# EAGLE board chaprshield (EAGLE 6.4)
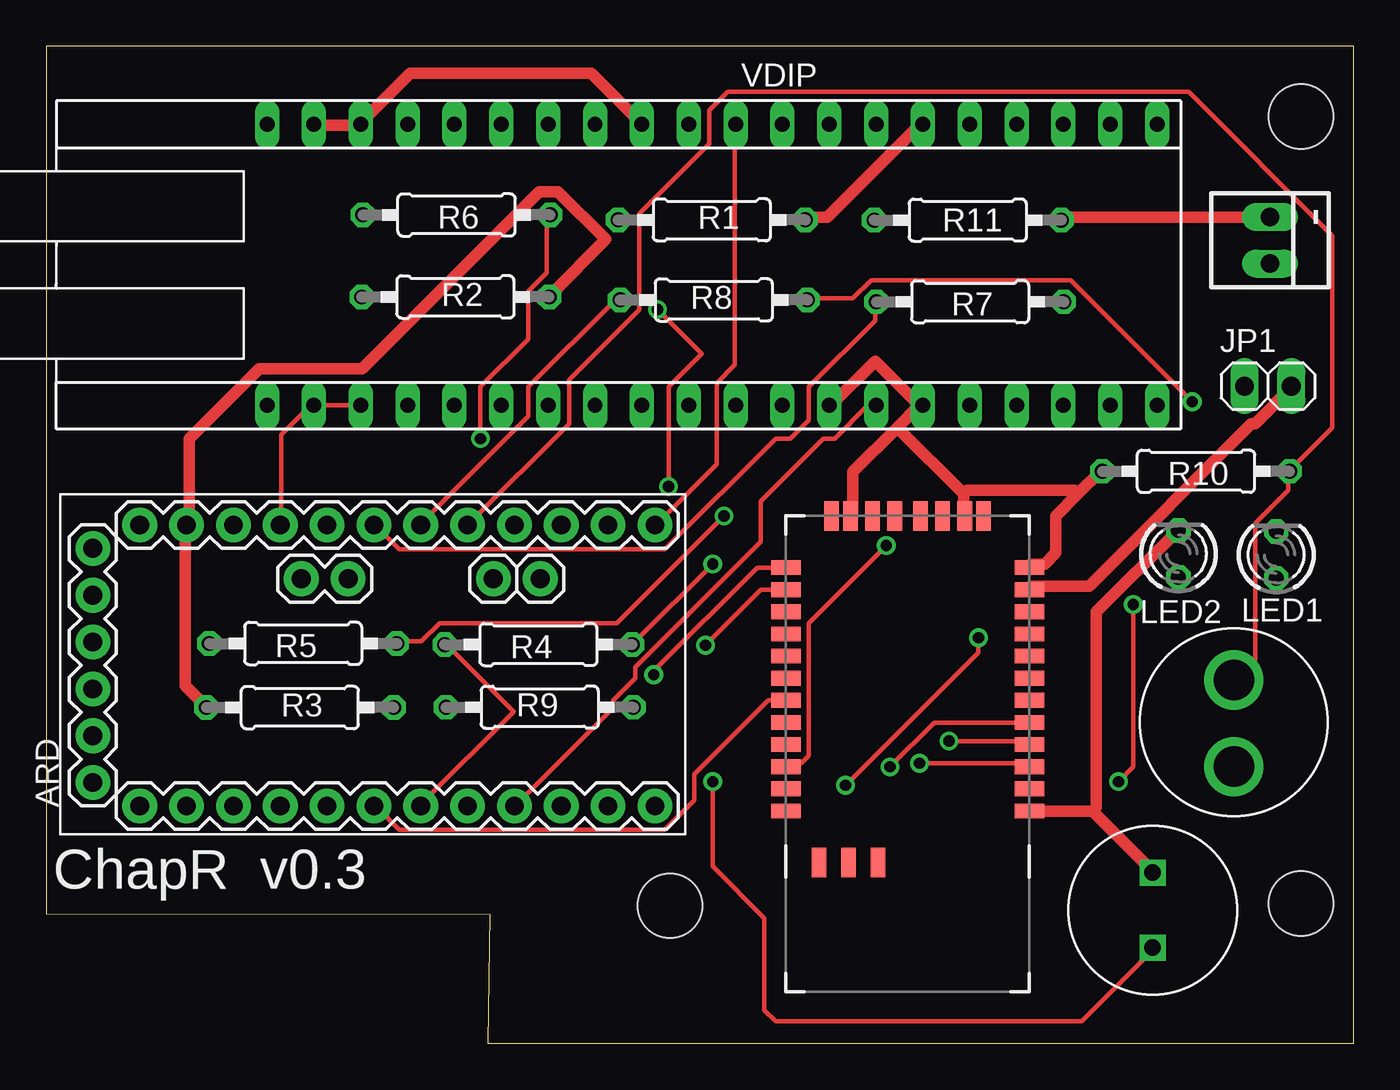
[diagram p0: board, top side]
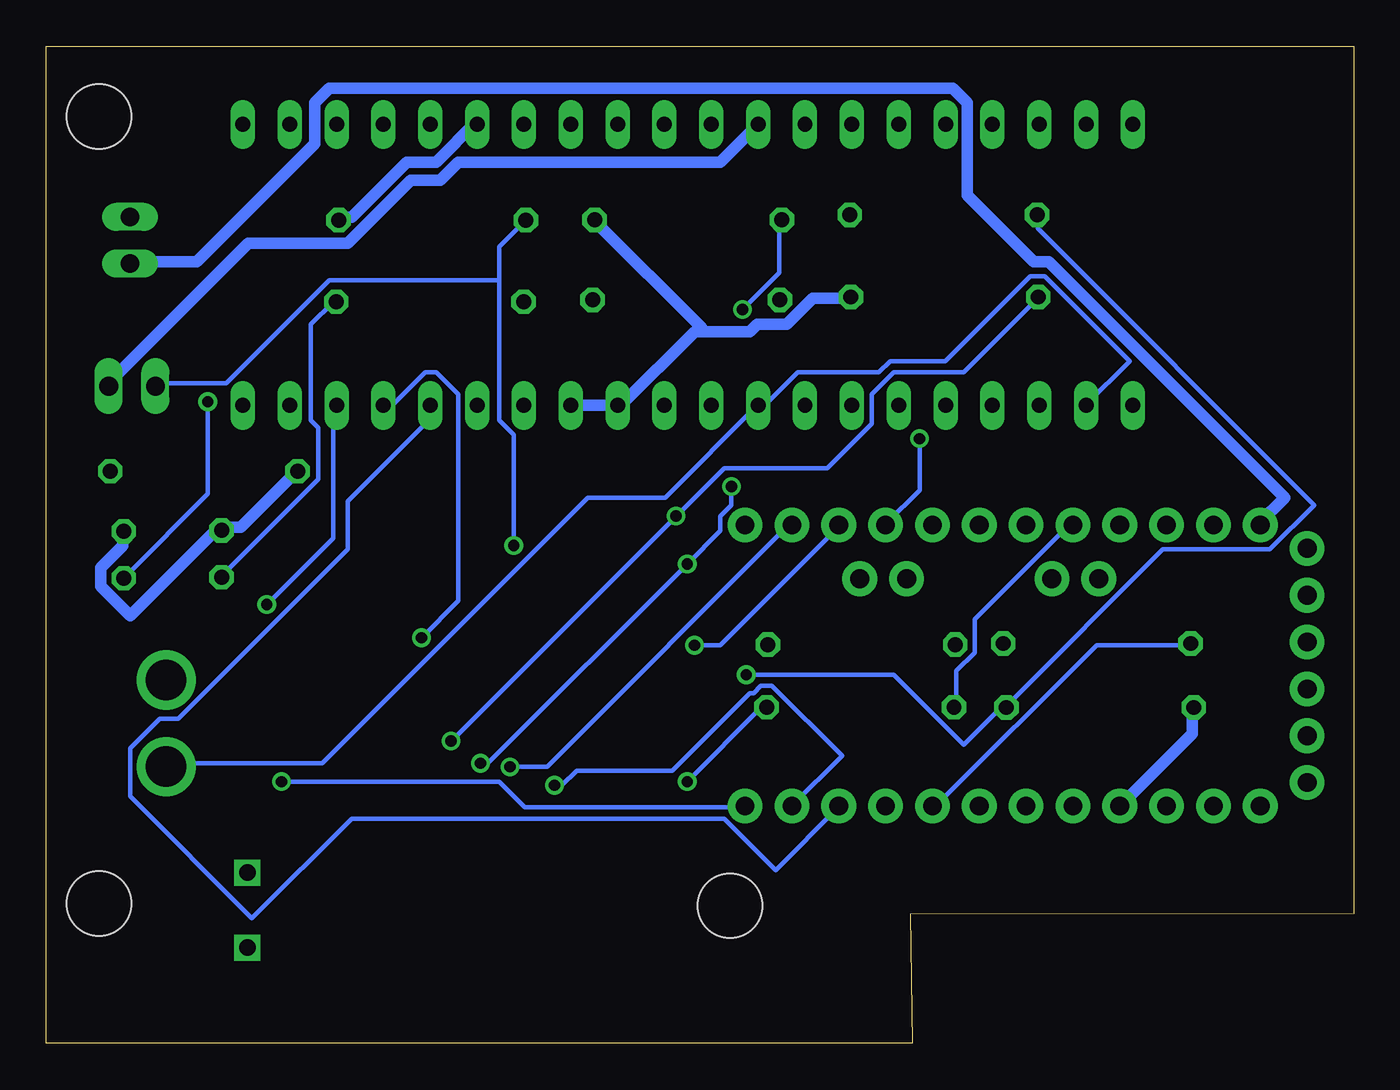
[diagram p1: board, bottom side, seen from below]

Size 70.92 x 54.09 mm. Coordinates in mm from the lower left corner, seen from the top.
Outline: 0,7.03 24.05,7 23.95,0 70.92,0.03 70.92,54.09 0,54.09 0,7.03
Copper layers (1*16): Top 0.035mm / dielectric 1.5mm / Bottom 0.035mm
Design rules "default *": minimum track width 10mil, minimum drill 24mil, track to track 8mil, track to pad 8mil, pad to pad 8mil, via to via 9mil, smd to smd 9mil, copper to edge 40mil, drill to drill 8mil, minimum pad ring 10mil, minimum via ring 8mil, stop-mask expansion 4mil, vias tented up to drill 0mil, thermal gap 10mil
Net classes: 1 GND: width 0.635 mm
Holes 3.5 mm at 68.06,50.27 68.06,7.6 33.82,7.47
tRestrict: area 39,26.8 to 41.5,29.4; area 51.8,26.7 to 54.3,29.3; area 39.2,1.8 to 54.4,12; area 31.9,5.4 to 35.9,9.4; area 66.1,5.6 to 70.1,9.6; area 66.2,48.3 to 70.2,52.3
bRestrict: area 39,26.8 to 41.5,29.4; area 51.8,26.7 to 54.3,29.3; area 39.1,1.8 to 54.3,12; area 66,5.6 to 70.2,9.6; area 66.2,48.4 to 70.3,52.3; area 31.8,5.5 to 35.9,9.4

## Footprints (pad centres in the part's own frame; a part is rotated, then mirrored left to right if it is on the bottom)
22-23-2021 = drill 1 long: 1 -1.27,0; 2 1.27,0
PROMINI = drill 1.016 pad 1.88: A0 6.35,-5.08; A1 6.35,-2.54; A2 6.35,0; A3 6.35,2.54; A4 3.429,1.397; A5 3.429,3.937; A6 3.429,-9.017; A7 3.429,-6.477; BLK -7.62,15.24; D2 -8.89,2.54; D3 -8.89,0; D4 -8.89,-2.54; D5 -8.89,-5.08; D6 -8.89,-7.62; D7 -8.89,-10.16; D8 -8.89,-12.7; D9 -8.89,-15.24; D10 6.35,-15.24; D11 6.35,-12.7; D12 6.35,-10.16; D13 6.35,-7.62; GND -8.89,5.08; GND2 6.35,10.16; GND3 -5.08,15.24; GRN 5.08,15.24; RAWV 6.35,12.7; RST -8.89,7.62; RST2 6.35,7.62; RXI -8.89,10.16; RXI2 0,15.24; TXO -8.89,12.7; TXO2 2.54,15.24; VCC 6.35,5.08; VCC2 -2.54,15.24
1X02 = drill 1.016 long: 1 -1.27,0; 2 1.27,0
LED3MM = drill 0.813 octagon: A -1.27,0; K 1.27,0
RN41 = smd 0.8 x 1.6: 1 -6.6,-6.6; 2 -5.4,-6.6; 3 -4.2,-6.6; 4 -3,-6.6; 5 -1.8,-6.6; 6 -0.6,-6.6; 7 0.6,-6.6; 8 1.8,-6.6; 9 3,-6.6; 10 4.2,-6.6; 11 5.4,-6.6; 12 6.6,-6.6; 13 6.6,6.6; 14 5.4,6.6; 15 4.2,6.6; 16 3,6.6; 17 1.8,6.6; 18 0.6,6.6; 19 -0.6,6.6; 20 -1.8,6.6; 21 -3,6.6; 22 -4.2,6.6; 23 -5.4,6.6; 24 -6.6,6.6 | smd 1.6 x 0.8: 25 -9.4,4.8; 26 -9.4,3.2; 27 -9.4,1.6; 28 9.4,3.1; 29 9.4,-3.1; 30 9.4,-4.122; 31 9.4,-1.9; 32 9.4,-0.7; 33 9.4,0.7; 34 9.4,1.9; 35 9.4,4.122
2-PIN-PUSHBUTTON = drill 2.2 pad 3.048: P$1 -1.778,0; P$2 2.921,0
0207/10 = drill 0.813 octagon: 1 -5.08,0; 2 5.08,0
SPEAKER = drill 0.9 square: + -2.032,0; - 2.032,0
VDIP2 = drill 0.813 long: 1 -24.13,-7.62; 2 -21.59,-7.62; 3 -19.05,-7.62; 4 -16.51,-7.62; 5 -13.97,-7.62; 6 -11.43,-7.62; 7 -8.89,-7.62; 8 -6.35,-7.62; 9 -3.81,-7.62; 10 -1.27,-7.62; 11 1.27,-7.62; 12 3.81,-7.62; 13 6.35,-7.62; 14 8.89,-7.62; 15 11.43,-7.62; 16 13.97,-7.62; 17 16.51,-7.62; 18 19.05,-7.62; 19 21.59,-7.62; 20 24.13,-7.62; 21 24.13,7.62; 22 21.59,7.62; 23 19.05,7.62; 24 16.51,7.62; 25 13.97,7.62; 26 11.43,7.62; 27 8.89,7.62; 28 6.35,7.62; 29 3.81,7.62; 30 1.27,7.62; 31 -1.27,7.62; 32 -3.81,7.62; 33 -6.35,7.62; 34 -8.89,7.62; 35 -11.43,7.62; 36 -13.97,7.62; 37 -16.51,7.62; 38 -19.05,7.62; 39 -21.59,7.62; 40 -24.13,7.62

## Placement (x,y rotation side)
-  9v power  [22-23-2021]  66.37,43.56 270 top
ARD  PROMINI  [PROMINI]  17.77,21.77 90 top
JP1  [1X02]  66.26,35.65 0 top
LED1  [LED3MM]  66.7,26.5 90 top
LED2  [LED3MM]  61.41,26.55 90 top
M2  RN42 Module  [RN41]  46.71,19.21 90 top
PB1  PUSHBUTTON  [2-PIN-PUSHBUTTON]  64.41,16.79 90 top
R1  19.1k  [0207/10]  36.09,44.66 180 top
R2  19.1k  [0207/10]  22.19,40.48 180 top
R3  19.1k  [0207/10]  13.77,18.22 0 top
R4  10k  [0207/10]  26.69,21.63 180 top
R5  10k  [0207/10]  13.94,21.69 180 top
R6  10k  [0207/10]  22.25,44.93 0 top
R7  470  [0207/10]  50.1,40.22 180 top
R8  470  [0207/10]  36.2,40.32 180 top
R9  100  [0207/10]  26.76,18.23 180 top
R10  10k  [0207/10]  62.35,31.03 0 top
R11  10k  [0207/10]  49.98,44.65 180 top
U$2  SPEAKER  [SPEAKER]  60,7.23 90 top
VDIP  VDIP2  [VDIP2]  36.11,42.22 0 top

## Library data of the parts
- = con-molex; MF: MOLEX; MPN: 22-23-2021; OC_FARNELL: 1462926; OC_NEWARK: 25C3832
ARD PB1 U$2 VDIP = ChapR-Custom
JP1 = pinhead
LED1 LED2 = led
M2 = SparkFun-RF
R1-R11 = resistor

## Nets
3.3V [GND]: JP1.2 M2.11 VDIP.32 VDIP.38 VDIP.39
+9V [GND]: -.2 ARD.RAWV
GND [GND]: -.1 ARD.GND ARD.GND2 LED1.K LED2.K M2.1 M2.12 M2.28 M2.29 R1.1 R2.1 R3.1 R10.1 R11.1 U$2.- VDIP.12 VDIP.13 VDIP.15 VDIP.26
LED1(BD5): VDIP.4
LED2(BD6): VDIP.5
N$1: ARD.VCC PB1.P$1 VDIP.2 VDIP.3 VDIP.9
N$2: ARD.D10 VDIP.30
N$3: ARD.D13 R6.2
N$4: ARD.D12 M2.14
N$5: ARD.D11 M2.5
N$6: M2.3 R1.2 R4.1
N$7: M2.4 R2.2 R5.1
N$8: ARD.D5 R5.2
N$9: M2.13 R3.2 R6.1
N$10: ARD.D9 VDIP.18
N$11: ARD.D8 VDIP.17
N$12: ARD.D7 VDIP.16
N$13: ARD.D6 VDIP.14
N$14: ARD.D4 R4.2
N$15: ARD.D3 M2.19
N$16: LED2.A R7.1
N$17: LED1.A R8.1
N$18: ARD.A2 R7.2
N$19: R9.1 U$2.+
N$20: ARD.A1 R8.2
N$21: ARD.A3 R9.2
N$22: JP1.1 M2.22 R11.2
N$24: ARD.A0 PB1.P$2 R10.2
NC(1): VDIP.1
NC(2): VDIP.40

## Tracks (layer width: path | path; a pad name or v marks a point on that pad's centre or on a via)
3.3V
  Top 0.635: VDIP.39 14.55,49.8 16.95,49.8 VDIP.38 17.15,50 19.75,52.6 29.55,52.6 32.16,50 VDIP.32 | M2.11 53.35,24.8 56.55,24.8 65.36,33.6 65.55,33.6 67.55,35.6 JP1.2
  Bottom 0.635: VDIP.32 32.35,49.8 34.35,47.8 48.55,47.8 49.55,46.8 51.16,46.8 54.55,43.4 59.95,43.4 67.55,35.8 JP1.2
+9V
  Bottom 0.635: -.2 66.36,42.4 62.75,42.4 56.35,48.8 56.35,51 55.55,51.8 21.75,51.8 20.95,51 20.95,46 17.35,42.4 16.55,42.4 3.75,29.6 5.16,28.2 ARD.RAWV
GND
  Top 0.635: 46.16,33.4 47.35,34.6 VDIP.15 47.16,34.8 44.95,37 42.55,34.6 VDIP.13 | 46.16,33.4 43.75,31 43.75,28.8 M2.28 | 49.75,29.8 49.75,28.8 M2.29 | 46.16,33.4 49.75,29.8 | 56.75,12.6 53.35,12.6 M2.1 | 56.75,12.6 59.95,9.4 U$2.- | 55.95,29.8 57.16,31 R10.1 | 55.95,29.8 54.75,28.6 54.75,26.6 54.16,26 53.35,26 M2.12 | 56.75,12.6 56.95,12.8 56.95,23.4 61.35,27.8 LED2.K | 49.75,29.8 49.95,30 55.75,30 55.95,29.8 | R3.1 8.55,18.4 7.55,19.4 7.55,28 ARD.GND2 7.75,28.4 7.75,32.8 11.55,36.6 17.15,36.6 26.75,46.2 27.75,46.2 30.35,43.6 27.35,40.6 R2.1 | R11.1 55.16,44.8 66.36,44.8 -.1 | R1.1 41.35,44.8 42.35,44.8 47.35,49.8 VDIP.26
  Bottom 0.635: R10.1 57.35,31 60.35,28 61.35,28 LED2.K 61.55,28 66.36,23.2 67.95,24.8 67.95,25.8 66.75,27 66.75,27.6 LED1.K | R3.1 8.76,18.2 8.76,16.8 12.55,13 ARD.GND | 35.35,38.6 35.75,38.6 39.75,34.6 VDIP.12 VDIP.13 | 35.35,38.6 32.75,38.6 32.35,39 30.75,39 29.35,40.4 27.35,40.4 R2.1 | R1.1 41.16,44.6 35.35,38.8 35.35,38.6 | R11.1 54.95,44.8 54.35,44.8 51.35,47.8 49.75,47.8 47.55,50 VDIP.26
N$1
  Top 0.254: VDIP.3 VDIP.2 14.36,34.6 12.76,33 12.76,28.2 ARD.VCC
  Bottom 0.254: VDIP.2 14.55,34.6 12.15,37 16.75,41.6 17.55,41.6 22.15,37 25.15,37 25.75,36.4 30.15,36.4 31.95,34.6 VDIP.9 32.35,34.6 37.35,29.6 41.55,29.6 55.95,15.2 64.36,15.2 PB1.P$1
N$2
  Top 0.254: VDIP.30 37.35,49.8 37.35,36.8 36.35,35.8 36.35,31.4 33.16,28.2 ARD.D10
N$3  (via drill 0.61)
  Top 0.254: v23.55,32.8 23.55,35.6 26.15,38.2 26.15,40.8 27.15,41.8 27.15,44.8 R6.2
  Bottom 0.254: v23.55,32.8 23.55,30 25.35,28.2 ARD.D13
N$4  (via drill 0.61)
  Top 0.254: v35.75,21.6 38.75,24.6 39.95,24.6 M2.14
  Bottom 0.254: v35.75,21.6 34.35,21.6 27.95,28 ARD.D12
N$5  (via drill 0.61)
  Top 0.254: v45.75,15 48.16,17.4 53.16,17.4 M2.5
  Bottom 0.254: v45.75,15 43.75,15 30.55,28.2 ARD.D11
N$6  (via drill 0.61)
  Top 0.254: v47.35,15.2 53.16,15.2 M2.3 | v36.16,26 31.95,21.8 R4.1 | v33.16,39.8 35.55,37.4 33.75,35.6 v33.75,30.2
  Bottom 0.254: v47.35,15.2 46.95,15.2 v36.16,26 34.35,27.8 34.35,28.6 33.75,29.2 v33.75,30.2 | v33.16,39.8 31.15,41.8 31.15,44.6 R1.2
N$7  (via drill 0.61)
  Top 0.254: v48.95,16.4 53.16,16.4 M2.4 | v36.75,28.6 30.95,22.8 21.35,22.8 20.35,21.8 19.15,21.8 R5.1
  Bottom 0.254: v48.95,16.4 v36.75,28.6 34.16,31.2 28.55,31.2 26.15,33.6 26.15,35.2 24.95,36.4 21.15,36.4 17.15,40.4 R2.2
N$8
  Bottom 0.254: R5.2 8.96,21.6 13.96,21.6 22.75,12.8 ARD.D5
N$9  (via drill 0.61)
  Top 0.254: v32.95,20 32.95,20.2 38.55,25.8 39.95,25.8 M2.13
  Bottom 0.254: v32.95,20 24.95,20 21.15,16.2 18.95,18.4 R3.2 18.75,18.4 10.36,26.8 4.55,26.8 2.16,29.2 17.15,44.2 17.15,44.8 R6.1
N$10  (via drill 0.61)
  Top 0.254: v58.95,23.8 58.95,15 v58.16,14.2
  Bottom 0.254: v58.95,23.8 55.35,27.4 55.35,34.6 VDIP.18 | v58.16,14.2 46.35,14.2 44.95,12.8 33.16,12.8 ARD.D9
N$11  (via drill 0.61)
  Top 0.254: v50.55,22 50.55,21.2 v43.35,14
  Bottom 0.254: VDIP.17 52.16,34.6 50.35,36.4 49.75,36.4 48.55,35.2 48.55,24 v50.55,22 | v43.35,14 42.95,14 42.16,14.8 36.95,14.8 32.75,19 32.55,19 32.16,19.4 31.55,19.4 27.75,15.6 ARD.D8
N$12
  Bottom 0.254: VDIP.16 50.16,34.6 50.16,33.8 54.55,29.4 54.55,26.8 63.75,17.6 64.75,17.6 66.36,16 66.36,13.4 59.75,6.8 54.35,12.2 34.16,12.2 31.35,9.4 27.95,12.8 ARD.D7
N$13
  Top 0.254: VDIP.14 44.55,34.6 42.75,32.8 42.16,32.8 38.75,29.4 38.75,27.2 31.95,20.4 31.95,19.8 30.75,18.6 30.75,18.2 25.55,13 ARD.D6
N$14
  Top 0.254: R4.2 21.75,21.6 25.35,18 20.35,13 ARD.D4
N$15
  Top 0.254: M2.19 39.95,18.6 39.16,18.6 35.16,14.6 35.16,13.2 33.55,11.6 19.15,11.6 17.95,12.8 ARD.D3
N$16
  Bottom 0.254: LED2.A 61.35,25.4 56.16,30.6 56.16,33.4 56.55,33.8 56.55,39 55.35,40.2 R7.1
N$17  (via drill 0.61)
  Top 0.254: v62.16,34.8 55.55,41.4 44.75,41.4 43.75,40.4 41.35,40.4 R8.1
  Bottom 0.254: v62.16,34.8 62.16,29.8 66.55,25.4 LED1.A
N$18
  Top 0.254: R7.2 44.95,40.2 44.95,39.2 41.35,35.6 41.35,33.8 40.35,32.8 39.55,32.8 33.55,26.8 19.15,26.8 17.95,28 ARD.A2
N$19  (via drill 0.61)
  Top 0.254: v36.16,14.2 36.16,9.6 38.95,6.8 38.95,1.8 39.55,1.2 56.16,1.2 59.95,5 U$2.+
  Bottom 0.254: v36.16,14.2 32.16,18.2 31.95,18.2 R9.1
N$20
  Top 0.254: R8.2 30.95,40.2 30.75,40.2 26.15,35.6 26.15,34 20.35,28.2 ARD.A1
N$21
  Bottom 0.254: R9.2 21.55,18.4 21.55,20.2 20.55,21.2 20.55,23 15.36,28.2 ARD.A3
N$22  (via drill 0.61)
  Top 0.254: v45.55,27 41.35,22.8 41.35,15.6 40.95,15.2 40.16,15.2 M2.22
  Bottom 0.254: v45.55,27 45.55,33 46.35,33.8 46.35,41.4 | 46.35,41.4 46.35,43.2 44.95,44.6 R11.2 | 46.35,41.4 55.55,41.4 61.16,35.8 64.95,35.8 JP1.1
N$24
  Top 0.254: PB1.P$2 64.55,19.8 65.55,20.8 65.55,28.2 67.36,30 67.36,31 R10.2 67.55,31.2 69.75,33.4 69.75,43.8 61.95,51.6 36.95,51.6 35.95,50.6 35.95,48.8 32.16,45 32.16,39.8 28.35,36 28.35,33.6 22.95,28.2 ARD.A0

## Text on the board
tPlace: ChapR v0.3